# Altium PCB PICOROM-Flex.PcbDoc
Units mm, origin at the board's own origin, x right, y up, seen from the top; angles counter-clockwise.
Board outline 30.97 x 12.2 mm, 4 copper layers (Top Layer, Mid-Layer 1, Layer 2, Bottom Layer); 52 components, 128 nets, 307 pads, 129 vias.
Unrouted connection lines stored in the file: 11.
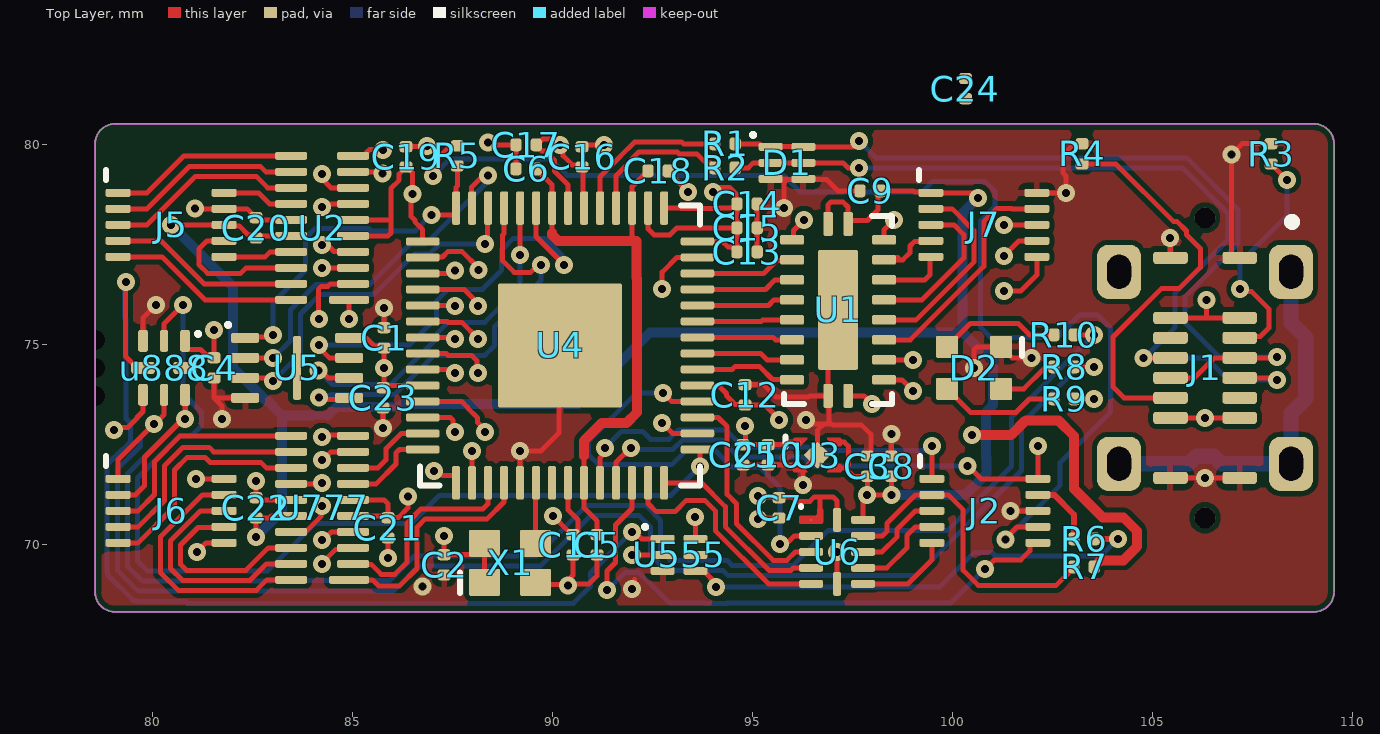
[diagram p0: Top Layer view]
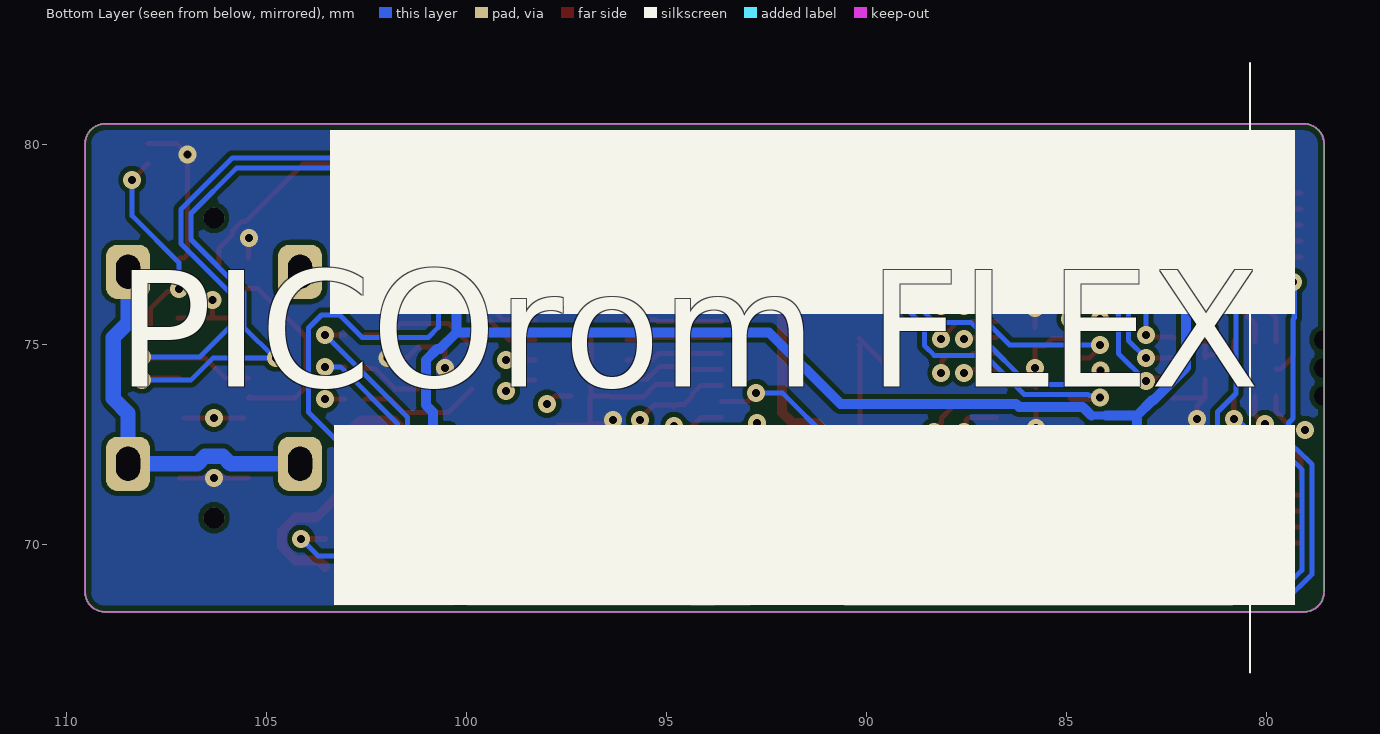
[diagram p1: Bottom Layer view, seen from below]
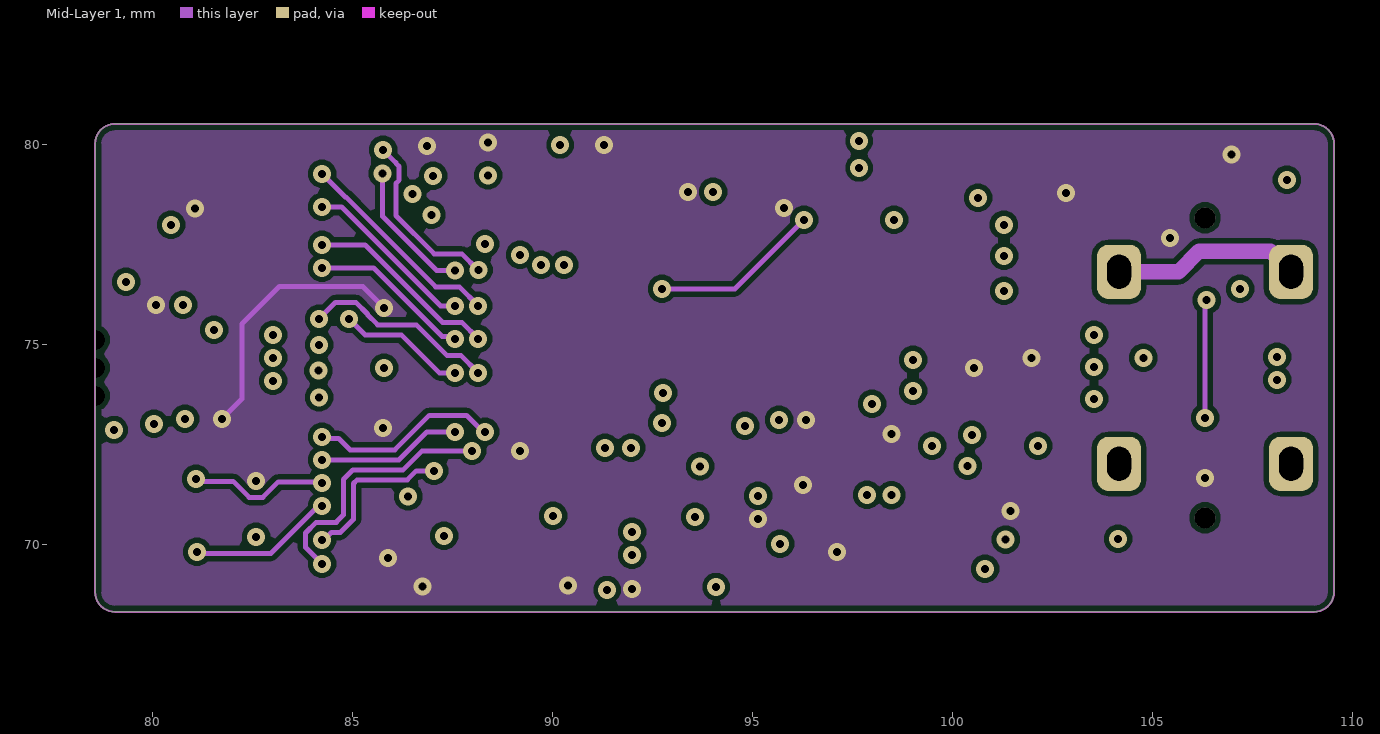
[diagram p2: Mid-Layer 1]
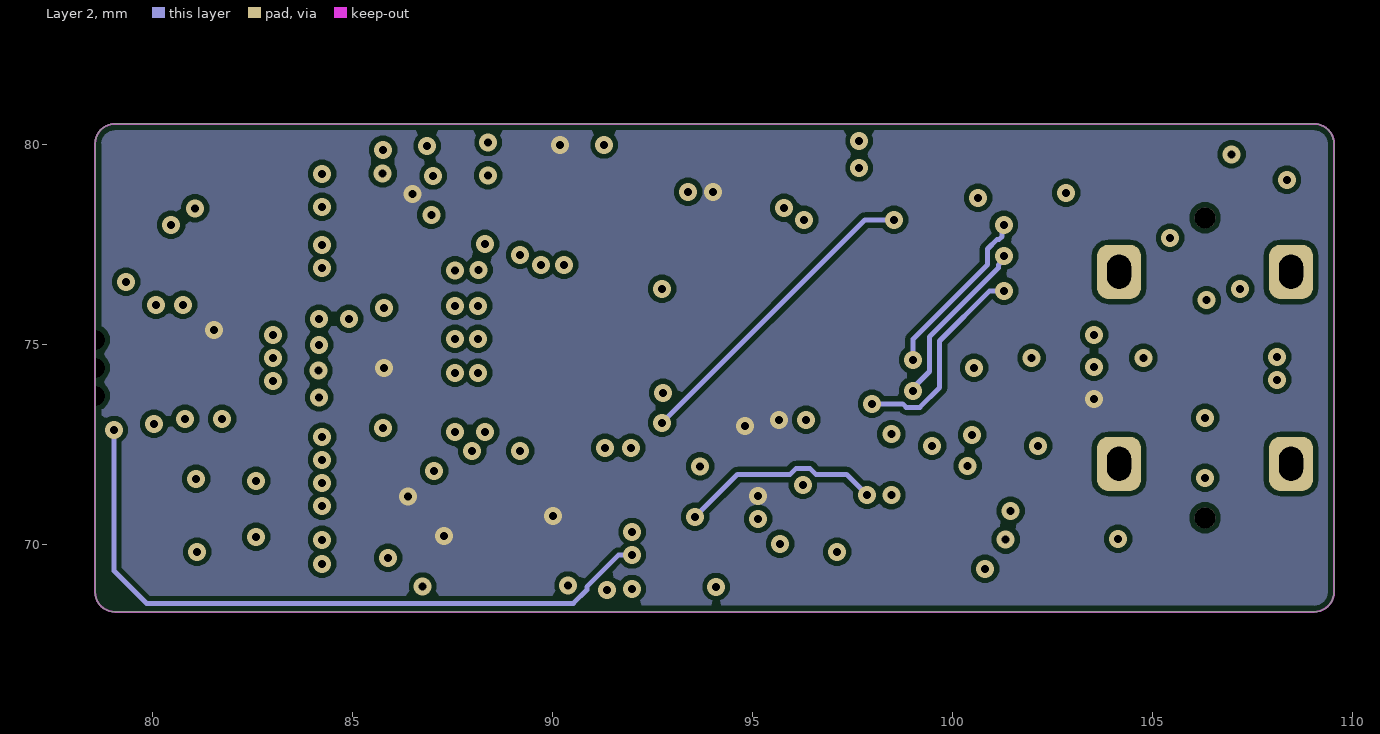
[diagram p3: Layer 2]
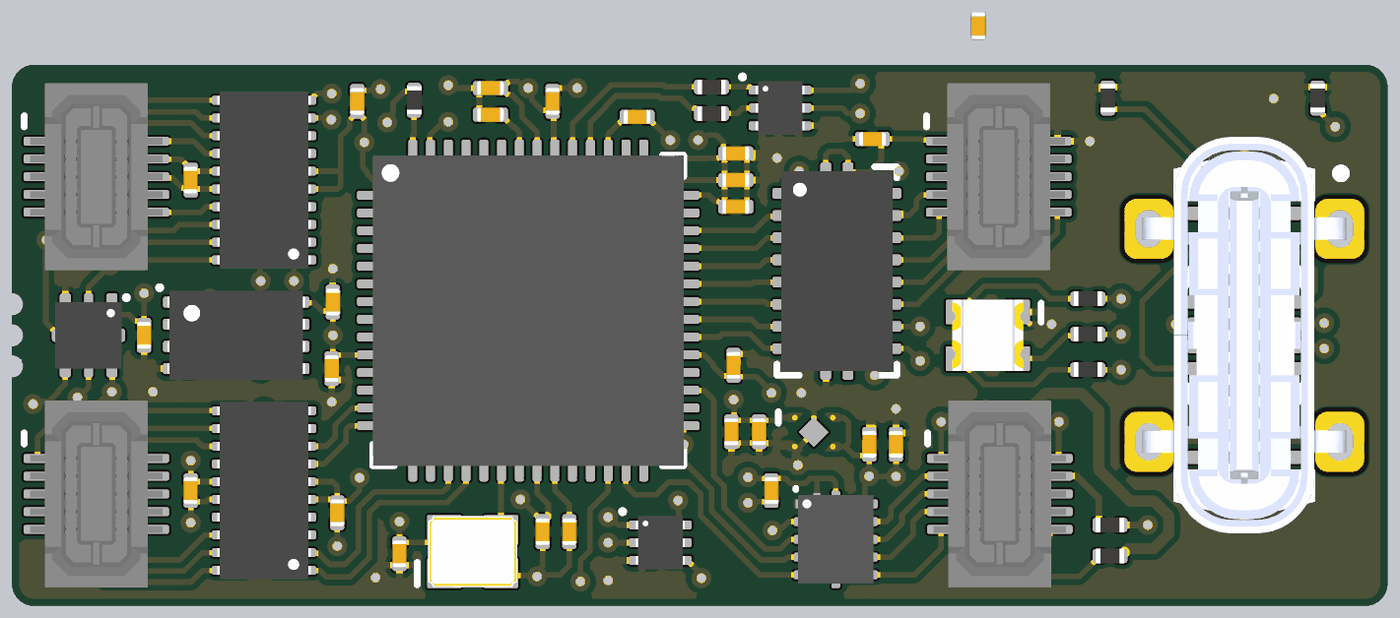
[diagram p4: 3D render of the assembled board from above, using the file's embedded part models]

## Layer stack, top to bottom
Top Solder: solder mask 0.0102, Solder Resist, Dk 3.5
Top Layer: signal copper 0.0356
Dielectric 1: dielectric 0.32, FR-4, Dk 4.8
Mid-Layer 1: signal copper 0.0356
Dielectric2: dielectric 0.32, FR-4, Dk 4.8
Layer 2: signal copper 0.035
Dielectric3: dielectric 0.32, FR-4, Dk 4.8
Bottom Layer: signal copper 0.0356
Bottom Solder: solder mask 0.0102, Solder Resist, Dk 3.5

## Board outline
78.569,68.826 78.569,80.026 cw(c79.069,80.026) 79.069,80.526 109.044,80.526 cw(c109.044,80.026) 109.544,80.026 109.544,68.826 cw(c109.044,68.826) 109.044,68.326 79.069,68.326 cw(c79.069,68.826)

## Design rules (kind name [scope] priority, off if disabled: settings)
Clearance [All] p1: gap=0.125 ignorepadtopadclearanceinfootprint=FALSE
ComponentClearance [All] p1: gap=0.1 collisioncheckmode=3 verticalgap=0.254 showdistances=FALSE
MinimumSolderMaskSliver [All] p1: minsoldermaskwidth=0.099
NetAntennae [All] p1: netantennaetolerance=0.1
PolygonConnect [All] p1: thpad.connectstyle=Direct thpad.reliefconductorwidth=0.254 thpad.reliefentries=4 thpad.polygonreliefangle="90 Angle" thpad.airgapwidth=0.254 smdpad.connectstyle=Relief smdpad.reliefconductorwidth=0.15 smdpad.reliefentries=4 smdpad.polygonreliefangle="90 Angle" smdpad.airgapwidth=0.15 via.connectstyle=Direct via.reliefconductorwidth=0.254 via.reliefentries=4 via.polygonreliefangle="90 Angle" via.airgapwidth=0.254
RoutingVias [All] p1: holewidth=0.2 width=0.45 viastyle="Through Hole" minholewidth=0.2 minwidth=0.45 maxholewidth=0.2 maxwidth=0.45
SilkToSilkClearance [All] p1: silktosilkclearance=0.1
SilkToSolderMaskClearance [IsPad] p1: minsilkscreentomaskgap=0.1 clearancetoexposedcopper=TRUE
SolderMaskExpansion [All] p1: expansion=0.102 istentingtop=FALSE
SupplyNets "Schematic Supply Nets_9" [InNet('RESET')] p1: voltage=0.000
SupplyNets "Schematic Supply Nets_8" [InNet('BOOT')] p2: voltage=0.000
SupplyNets "Schematic Supply Nets_7" [InNet('EXTRES')] p3: voltage=0.000
SupplyNets "Schematic Supply Nets_6" [InNet('P5V')] p4: voltage=0.000
SupplyNets "Schematic Supply Nets_5" [InNet('SWD')] p5: voltage=0.000
SupplyNets "Schematic Supply Nets_4" [InNet('P1V1')] p6: voltage=0.000
SupplyNets "Schematic Supply Nets_3" [InNet('P3V3')] p7: voltage=0.000
SupplyNets "Schematic Supply Nets_2" [InNet('SWC')] p8: voltage=0.000
SupplyNets "Schematic Supply Nets_1" [InNet('GND')] p9: voltage=0.000
SupplyNets "Schematic Supply Nets" [InNet('VUSB')] p10: voltage=0.000
Width [All] p1: maxlimit=5 minlimit=0.125 preferedwidth=0.125
25 further rules are at their usual default settings.

## Classes and differential pairs
component class 2716-2736: J10 U7

## Components (designator, comment, footprint, x,y, rotation, side; value= is the part's Value field where it differs from the comment)
C1 "CAP0201" CAPC0201 85.794,75.176 r90 top
C2 "CAP0201" CAPC0201 87.294,69.501 r270 top
C3 "CAP0201" CAPC0201 97.876,71.969 r90 top
C4 "CAP0201" CAPC0201 81.544,74.426 r270 top
C5 "CAP0201" CAPC0201 91.119,70.001 r270 top
C6 "CAP0201" CAPC0201 89.344,79.401 r180 top
C7 "CAP0201" CAPC0201 95.669,70.926 r270 top
C8 "CAP0201" CAPC0201 98.476,71.969 r90 top
C9 "CAP0201" CAPC0201 97.944,78.851 r180 top
C10 "CAP0201" CAPC0201 95.394,72.251 r270 top
C11 "CAP0201" CAPC0201 90.519,70.001 r270 top
C12 "CAP0201" CAPC0201 94.819,73.751 r90 top
C13 "CAP0201" CAPC0201 94.869,77.326 r0 top
C14 "CAP0201" CAPC0201 94.869,78.526 r0 top
C15 "CAP0201" CAPC0201 94.869,77.926 r0 top
C16 "CAP0201" CAPC0201 90.744,79.701 r90 top
C17 "CAP0201" CAPC0201 89.344,80.001 r180 top
C18 "CAP0201" CAPC0201 92.644,79.351 r0 top
C19 "CAP0201" CAPC0201 86.344,79.701 r90 top
C20 "CAP0201" CAPC0201 82.594,77.926 r90 top
C21 "CAP0201" CAPC0201 85.894,70.426 r270 top
C22 "CAP0201" CAPC0201 82.594,70.926 r90 top
C23 "CAP0201" CAPC0201 85.769,73.676 r270 top
C24 "CAP0201" CAPC0201 100.33,81.407 r270 top
C25 "CAP0201" CAPC0201 94.769,72.251 r270 top
D1 "CDDFN6-3312P" SON40P100X50-6L 95.869,79.551 r0 top
D2 "RGB" LED-1616-RGB 100.544,74.426 r0 top
J1 "CONN-SAMESKY-UJ20-C-V-G-SMT-P16-TR" CONN-SAMESKY-UJ20-C-V-G-SMT-P16-TR 106.319,74.426 r270 top
J2 "CONN-HIROSE-DF37NC-10DS" CONN-HIROSE-DF37NC-10DS 100.814,70.851 r0 top
J5 "CONN-HIROSE-DF37NC-10DS" CONN-HIROSE-DF37NC-10DS 80.469,78.001 r0 top
J6 "CONN-HIROSE-DF37NC-10DS" CONN-HIROSE-DF37NC-10DS 80.469,70.851 r0 top
J7 "CONN-HIROSE-DF37NC-10DS" CONN-HIROSE-DF37NC-10DS 100.789,78.001 r0 top
R1 "RESC0201" RESC0201 94.319,80.026 r180 top value=27R
R2 "RESC0201" RESC0201 94.319,79.426 r180 top value=27R
R3 "RESC0201" RESC0201 107.969,79.776 r270 top value=5K1
R4 "RESC0201" RESC0201 103.244,79.776 r90 top value=5K1
R5 "RESC0201" RESC0201 87.624,79.726 r270 top value=1K
R6 "RESC0201" RESC0201 103.294,70.151 r0 top value=27R
R7 "RESC0201" RESC0201 103.294,69.451 r0 top value=100K
R8 "RESC0201" RESC0201 102.794,74.451 r0 top value=1K
R9 "RESC0201" RESC0201 102.794,73.651 r0 top value=1K
R10 "RESC0201" RESC0201 102.794,75.251 r0 top value=1K
U1 "74AHCT245" QFN50P450X250-20TH300X100 97.144,75.876 r0 top
U2 "IC-TI-TXB0108-DQS" SON40P200X55-20N 84.244,77.926 r180 top
U3 "TPS7A0233PDQNR" X2SON4-1X1 96.626,72.244 r0 top
U4 "IC-RPI-RP2040-PICOROM" QFN40P700X700X90-56N-TH310X310 90.194,74.986 r0 top
U5 "IC-WINBOND-W25Q128JVS" SON50P300X60_HS-9N 83.619,74.426 r0 top
U6 "IC-TI-TXB0104-RUT" FOOTPRINT-TI-RUT 97.119,69.826 r0 top
U555 "74LVC1G126" SON40P100X50-6L 93.169,69.751 r0 top
U777 "IC-TI-TXB0108-DQS" SON40P200X55-20N 84.244,70.926 r180 top
u888 "TCA5405RUGR" PQFN50P150X150X40-8N 80.294,74.426 r270 top (schematic designator U888)
X1 "XOSC" XOSC-YXC-2016 88.944,69.551 r0 top

## Footprints (in the part's own frame and the unit in brackets; to place one, negate y for a bottom-side part, rotate by r counter-clockwise, add the part's x,y. Pads: shape width x height; smd on the part's side, far side on the other; paste and mask are expansions set on the pad)
CAPC0201 [mm]
  rrect50% 0.28x0.32 smd mask+0.05: 1(-0.253,0) 2(0.253,0)
  body extent -0.32,-0.16 0.31,0.17, height 0.33
CONN-HIROSE-DF37NC-10DS [mm]
  rrect50% 0.63x0.2 smd paste+0 mask+0.05: 1(-1.325,0.8) 2(1.325,0.8) 3(-1.325,0.4) 4(1.325,0.4) 5(-1.325,0) 6(1.325,0) 7(-1.325,-0.4) 8(1.325,-0.4) 9(-1.325,-0.8) 10(1.325,-0.8)
  silkscreen extent -1.63,1.12 -1.63,1.38, body extent -1.49,-2.11 1.49,2.11, height 0.99
CONN-SAMESKY-UJ20-C-V-G-SMT-P16-TR [mm]
  rrect50% 0.3x0.87 smd mask+0.05: A1(-2.75,0.865) A4(-1.25,0.865) A5(-0.75,0.865) A6(-0.25,0.865) A7(0.25,0.865) A8(0.75,0.865) A9(1.25,0.865) A12(2.75,0.865) B1(2.75,-0.865) B4(1.25,-0.865) B5(0.75,-0.865) B6(0.25,-0.865) B7(-0.25,-0.865) B8(-0.75,-0.865) B9(-1.25,-0.865) B12(-2.75,-0.865)
  rrect50% 1.35x1.1 hole 0.6 slot 0.85 at 0 deg mask+0.1: SH1(-2.4,2.15) SH2(2.4,2.15) SH3(-2.4,-2.15) SH4(2.4,-2.15)
  round 0.52 hole 0.52 unplated mask+0.15: ""(-3.75,0) ""(3.75,0)
  silkscreen extent -3.75,2.08 -3.55,2.27, body extent -4.47,-2.3 4.47,2.3, height 6.41
FOOTPRINT-TI-RUT [mm] "R-PUQFN-N12, TI RUT"
  round 0.025 smd paste+0 mask+0.05: 1(-0.65,0.8)
  rrect50% 0.6x0.2 smd paste+0 mask+0.05: 2(-0.65,0.4) 3(-0.65,0) 4(-0.65,-0.4) 5(-0.65,-0.8) 7(0.65,-0.8) 8(0.65,-0.4) 9(0.65,0) 10(0.65,0.4) 11(0.65,0.8)
  rrect50% 0.2x0.6 smd paste+0 mask+0.05: 6(0,-0.8) 12(0,0.8)
  Top Layer region: -0.9,0.9 -0.919,0.896 -0.935,0.885 -0.946,0.869 -0.95,0.85 -0.95,0.85 -0.95,0.75 -0.946,0.731 -0.935,0.715 -0.919,0.704 -0.9,0.7 -0.9,0.7 -0.4,0.7 -0.381,0.704 -0.365,0.715 -0.354,0.731 -0.35,0.75 -0.35,0.75 -0.35,1.05 -0.354,1.069 -0.365,1.085 -0.381,1.096 -0.4,1.1 -0.4,1.1 -0.45,1.1 -0.469,1.096 -0.485,1.085 -0.496,1.069 -0.5,1.05 -0.5,1.05 -0.5,0.95 -0.504,0.931 -0.515,0.915 -0.531,0.904 -0.55,0.9 -0.55,0.9
  silkscreen extent -0.9,1.12 -0.9,1.15, body extent -0.85,-1 0.85,1, height 0.55
LED-1616-RGB [mm]
  rrect12% 0.55x0.55 smd paste+0 mask+0.05: 1(0.675,0.525) 2(-0.675,0.525) 3(-0.675,-0.525) 4(0.675,-0.525)
  silkscreen extent 1.2,0.3 1.2,0.72, body extent -0.8,-0.8 0.8,0.8, height 0.71
PQFN50P150X150X40-8N [mm] "PQFN, 8-Leads, Body 1.50x1.50mm, Pitch 0.50mm, IPC Medium Density"
  rrect50% 0.55x0.25 smd mask+0.05: 1(-0.675,0.525) 3(-0.675,-0.525) 5(0.675,-0.525) 7(0.675,0.525)
  rrect50% 0.55x0.2 smd mask+0.05: 2(-0.675,0) 6(0.675,0)
  rrect50% 0.3x0.6 smd mask+0.05: 4(0,-0.525) 8(0,0.525)
  silkscreen extent -0.9,0.8 -0.8,0.9, body extent -0.75,-0.75 0.75,0.75, height 0.4
QFN40P700X700X90-56N-TH310X310 [mm]
  rrect50% 0.84x0.2 smd mask+0.05: 1(-3.435,2.6) 2(-3.435,2.2) 3(-3.435,1.8) 4(-3.435,1.4) 5(-3.435,1) 6(-3.435,0.6) 7(-3.435,0.2) 8(-3.435,-0.2) 9(-3.435,-0.6) 10(-3.435,-1) 11(-3.435,-1.4) 12(-3.435,-1.8) 13(-3.435,-2.2) 14(-3.435,-2.6) 29(3.435,-2.6) 30(3.435,-2.2) 31(3.435,-1.8) 32(3.435,-1.4) 33(3.435,-1) 34(3.435,-0.6) 35(3.435,-0.2) 36(3.435,0.2) 37(3.435,0.6) 38(3.435,1) 39(3.435,1.4) 40(3.435,1.8) 41(3.435,2.2) 42(3.435,2.6)
  rrect50% 0.2x0.84 smd mask+0.05: 15(-2.6,-3.435) 16(-2.2,-3.435) 17(-1.8,-3.435) 18(-1.4,-3.435) 19(-1,-3.435) 20(-0.6,-3.435) 21(-0.2,-3.435) 22(0.2,-3.435) 23(0.6,-3.435) 24(1,-3.435) 25(1.4,-3.435) 26(1.8,-3.435) 27(2.2,-3.435) 28(2.6,-3.435) 43(2.6,3.435) 44(2.2,3.435) 45(1.8,3.435) 46(1.4,3.435) 47(1,3.435) 48(0.6,3.435) 49(0.2,3.435) 50(-0.2,3.435) 51(-0.6,3.435) 52(-1,3.435) 53(-1.4,3.435) 54(-1.8,3.435) 55(-2.2,3.435) 56(-2.6,3.435)
  rrect3% 3.1x3.1 smd paste-0.57 mask+0.05: 57(0,0)
  silkscreen extent -3.5,-3.5 3.5,3.5, body extent -3.5,-3.5 3.5,3.5, height 0.9
QFN50P450X250-20TH300X100 [mm]
  rrect41% 0.24x0.6 smd mask+0.051: 1(-0.25,2.15) 10(-0.25,-2.15) 11(0.25,-2.15) 20(0.25,2.15)
  rrect41% 0.6x0.24 smd mask+0.051: 2(-1.15,1.75) 3(-1.15,1.25) 4(-1.15,0.75) 5(-1.15,0.25) 6(-1.15,-0.25) 7(-1.15,-0.75) 8(-1.15,-1.25) 9(-1.15,-1.75) 12(1.15,-1.75) 13(1.15,-1.25) 14(1.15,-0.75) 15(1.15,-0.25) 16(1.15,0.25) 17(1.15,0.75) 18(1.15,1.25) 19(1.15,1.75)
  rrect10% 1x3 smd mask+0.051: 21(0,0)
  silkscreen extent -1.35,-2.35 1.35,2.35, body extent -1.25,-2.25 1.25,2.25, height 0.9
RESC0201 [mm] "RES, 0201 Chip Resistor, 2-Leads, Body 0.60x0.30mm, IPC High Density"
  rrect50% 0.28x0.32 smd mask+0.05: 1(-0.253,0) 2(0.253,0)
  body extent -0.32,-0.17 0.32,0.17, height 0.26
SON40P100X50-6L [mm] "SON, 6-Leads, Body 1.20x1.00mm, Pitch 0.40mm, IPC High Density"
  rrect50% 0.6x0.2 smd mask+0.05: 1(-0.41,0.4) 2(-0.41,0) 3(-0.41,-0.4) 4(0.41,-0.4) 5(0.41,0) 6(0.41,0.4)
  silkscreen extent -0.9,0.65 -0.8,0.75, body extent -0.55,-0.6 0.55,0.6, height 0.5
SON40P200X55-20N [mm] "SON, 20-Leads, Body 4.00x2.00mm, Pitch 0.40mm, IPC Medium Density"
  rrect50% 1x0.2 smd mask+0.05: 1(-0.675,1.8)
  rrect50% 0.8x0.2 smd mask+0.05: 2(-0.775,1.4) 3(-0.775,1) 4(-0.775,0.6) 5(-0.775,0.2) 6(-0.775,-0.2) 7(-0.775,-0.6) 8(-0.775,-1) 9(-0.775,-1.4) 10(-0.775,-1.8) 11(0.775,-1.8) 12(0.775,-1.4) 13(0.775,-1) 14(0.775,-0.6) 15(0.775,-0.2) 16(0.775,0.2) 17(0.775,0.6) 18(0.775,1) 19(0.775,1.4) 20(0.775,1.8)
  body extent -1.05,-2 1.05,2, height 0.55
SON50P300X60_HS-9N [mm] "SON, 8-Leads, Body 2.00x3.00mm, Pitch 0.50mm, Thermal Pad 1.60x0.20mm, IPC Medium Density"
  rrect40% 0.7x0.25 smd mask+0.05: 1(-1.3,0.75) 2(-1.3,0.25) 3(-1.3,-0.25) 4(-1.3,-0.75) 5(1.3,-0.75) 6(1.3,-0.25) 7(1.3,0.25) 8(1.3,0.75)
  rrect50% 0.2x1.6 smd mask+0.05: 9(0,0)
  silkscreen extent -1.77,1.03 -1.68,1.12, body extent -1.55,-1 1.55,1, height 0.6
X2SON4-1X1 [mm] "FOOTPRINT, TI, DQN0004A X2SON4"
  round 0.025 smd mask+0.05: 1(-0.43,0.325) 2(-0.43,-0.325) 3(0.43,-0.325) 4(0.43,0.325)
  rrect4% 0.48x0.48 smd rot 45 mask+0.05: 5(0,0)
  Top Layer region: 0.43,0.22 0.25,0.4 0.25,0.43 0.559,0.43 0.579,0.426 0.595,0.415 0.606,0.399 0.61,0.379 0.61,0.379 0.61,0.271 0.606,0.251 0.595,0.235 0.579,0.224 0.559,0.22 0.559,0.22 0.52,0.22
  Top Layer region: -0.43,0.22 -0.25,0.4 -0.25,0.43 -0.559,0.43 -0.579,0.426 -0.595,0.415 -0.606,0.399 -0.61,0.379 -0.61,0.379 -0.61,0.271 -0.606,0.251 -0.595,0.235 -0.579,0.224 -0.559,0.22 -0.559,0.22 -0.52,0.22
  Top Layer region: -0.43,-0.22 -0.25,-0.4 -0.25,-0.43 -0.559,-0.43 -0.579,-0.426 -0.595,-0.415 -0.606,-0.399 -0.61,-0.379 -0.61,-0.379 -0.61,-0.271 -0.606,-0.251 -0.595,-0.235 -0.579,-0.224 -0.559,-0.22 -0.559,-0.22 -0.52,-0.22
  Top Layer region: 0.43,-0.22 0.25,-0.4 0.25,-0.43 0.559,-0.43 0.579,-0.426 0.595,-0.415 0.606,-0.399 0.61,-0.379 0.61,-0.379 0.61,-0.271 0.606,-0.251 0.595,-0.235 0.579,-0.224 0.559,-0.22 0.559,-0.22 0.52,-0.22
  silkscreen extent -0.8,0.2 -0.8,0.46, body extent -0.5,-0.5 0.5,0.5, height 0.4
XOSC-YXC-2016 [mm] "YSO110TR"
  rrect10% 0.775x0.675 smd paste+0 mask+0.05: 1(-0.637,-0.487) 2(0.637,-0.487) 3(0.637,0.487) 4(-0.637,0.487)
  silkscreen extent -1.25,-0.75 -1.25,-0.24, body extent -1,-0.8 1,0.8, height 0.76

## Part data
C1 C2 C3 C4 C5 C6 C7 C8 C9 C10 C11 C12 C13 C14 C15 C16 C17 C18 C19 C20 C21 C22 C23 C24 C25: library part CAPC-0201-100nF-16V, "CAPACITOR,CERAMIC,100nF,16V,X7R,0201", Capacitance=100nF, Dielectric=X7R, LCSC=C668346, Package / Case=0402, Supplier Part Number 1=490-GRM033Z71C104KE14DCT-ND, Voltage=16V, Supplier 1=Digikey
D1: library part TVS-BOURNS-CDDFN6-3312P, LCSC=C3700524
D2: library part LED-TOGIALED-TJ-S1615CY6TGLCCSRGB-A5, LCSC=C601684, MFR=KINGBRIGHT, MPN=APTF1616SEKJ3ZGKQBKC
J1: LCSC=C2686963, MFR=SAMESKY, MPN=UJ20-C-V-G-SMT-P16-TR, Package=None, Availability=Unavailable, MP=UJ20-C-V-G-SMT-P16-TR, Price=None
J2 J5 J6 J7: LCSC=C324718
R1 R2 R6: library part RESC-0201-27R-1%-1/10W, "RESISTOR,27R,1%,63mW,0201", LCSC=C473051, Power=1/16W, Tolerance=1%
R3 R4: library part RESC-0201-5K1-1%-1/10W, "RESISTOR,5K1,1%,63mW,0201", LCSC=C274341, Power=1/16W, Tolerance=1%
R5 R8 R9 R10: library part RESC-0201-1K-1%-1/10W, "RESISTOR,1K,1%,63mW,0201", LCSC=C138165, Power=1/16W, Tolerance=1%
R7: library part RESC-0201-100K-1%-1/10W, "RESISTOR,100K,1%,63mW,0201", LCSC=C106224, Power=1/16W, Tolerance=1%
U1: library part IC-NEXPERIA-74AHCT245
U3: library part IC-TI-TPS7A0233PDQNR, LCSC=C2860046
U4: LCSC=C2040
U555: library part IC-DIODES-74LVC1G126-SON6, MPN=C163712
u888: library part IC-TI-TCA5405RUGR, MPN=C2674123
X1: library part XOSC-YXC-OT201612MJBA4SL, "XTAL,4PIN", LCSC=C669076

## Free pads (board coordinates)
  rrect0% 0x0 hole 0.5 unplated paste-2539.97 mask+0.15: MB(78.569,73.726) MB(78.569,74.426) MB(78.569,75.126)

## Via types
v1: diameter 0.45, hole 0.2, Top Layer to Bottom Layer, tented both sides, 129 vias

## Nets (pads, with @x,y where several pads share a name; then routed paths per layer and width w, separated by ;. In a path a pad name is that pad's centre, name@x,y a point inside that pad or via, vN(x,y) a via of type N, cw(c..) or ccw(c..) an arc to the next point about the centre after c; other vN are vias at no path point)
A0: U2.10 U4.2 | length 7.3
  Top Layer w0.125: U2.10@84.744,79.726 85.319,79.726 85.357,79.764 85.357,79.809 85.43,79.882 85.763,79.882 v1(85.769,79.876) ; U4.2 86.769,77.196 87.255,77.196 87.398,77.339 87.74,77.339 88.155,76.923 v1(88.155,76.873)
  Mid-Layer 1 w0.125: v1(85.769,79.876) 86.089,79.556 86.089,79.543 86.173,79.459 86.173,79.118 86.089,79.034 86.089,78.235 87.048,77.276 87.74,77.276 88.143,76.873 v1(88.155,76.873)
A1: U2.9 U4.3 | length 5.3
  Top Layer w0.125: U2.9@84.744,79.326 85.723,79.326 v1(85.761,79.289) ; U4.3 87.404,76.786 87.481,76.863 v1(87.569,76.863)
  Mid-Layer 1 w0.125: v1(85.761,79.289) 85.761,78.209 87.107,76.863 v1(87.569,76.863)
A2: U2.8 U4.4 | length 7.6
  Top Layer w0.125: v1(84.244,79.276) 84.306,79.214 84.306,79.087 84.467,78.926 U2.8@84.744,78.926 ; U4.4 87.371,76.386 87.373,76.388 87.794,76.388 88.144,76.038 v1(88.144,75.976)
  Mid-Layer 1 w0.125: v1(84.244,79.276) 84.819,78.701 84.833,78.701 87.083,76.451 87.677,76.451 88.144,75.984 v1(88.144,75.976)
A3: U2.7 U4.5 | length 5.7
  Top Layer w0.125: v1(84.244,78.451) 84.332,78.451 84.407,78.526 U2.7@84.744,78.526 ; U4.5 87.559,75.986 v1(87.569,75.976)
  Mid-Layer 1 w0.125: v1(84.244,78.451) 84.729,78.451 87.204,75.976 v1(87.569,75.976)
A4: U2.4 U4.6 | length 7.3
  Top Layer w0.125: v1(84.244,77.501) 84.306,77.439 84.442,77.439 84.544,77.337 84.983,77.337 U2.4@84.994,77.326 ; U4.6 87.376,75.586 87.398,75.563 87.74,75.563 88.144,75.159 v1(88.144,75.151)
  Mid-Layer 1 w0.125: v1(84.244,77.501) 85.319,77.501 87.257,75.563 87.74,75.563 88.144,75.159 v1(88.144,75.151)
A5: U2.3 U4.7 | length 5.4
  Top Layer w0.125: v1(84.244,76.926) U2.3@84.744,76.926 ; U4.7 87.534,75.186 v1(87.569,75.151)
  Mid-Layer 1 w0.125: v1(84.244,76.926) 85.53,76.926 87.243,75.213 87.507,75.213 v1(87.569,75.151)
A6: U2.2 U4.8 | length 8.3
  Top Layer w0.125: v1(84.169,75.651) 84.149,75.671 84.149,76.39 84.222,76.463 84.39,76.463 84.452,76.526 U2.2@84.994,76.526 ; U4.8 87.351,74.786 87.398,74.738 87.982,74.738 88.115,74.605 88.115,74.33 v1(88.144,74.301)
  Mid-Layer 1 w0.125: v1(84.169,75.651) 84.582,76.064 85.09,76.064 85.382,75.772 85.382,75.755 85.636,75.501 86.602,75.501 87.364,74.738 87.715,74.738 88.144,74.309 v1(88.144,74.301)
A7: U2.1 U4.9 | length 4.5
  Top Layer w0.125: v1(84.919,75.651) U2.1 ; U4.9 87.396,74.386 87.481,74.301 v1(87.569,74.301)
  Mid-Layer 1 w0.125: v1(84.919,75.651) 85.319,75.251 86.227,75.251 87.177,74.301 v1(87.569,74.301)
A8: U4.11 U777.10 | length 7.5
  Top Layer w0.125: v1(84.244,72.701) 84.292,72.749 84.996,72.749 U777.10 ; U4.11 87.734,73.586 87.877,73.443 87.877,73.431 88.134,73.174 88.134,73.062 88.319,72.877 v1(88.319,72.826)
  Mid-Layer 1 w0.125: v1(84.244,72.701) 84.282,72.664 84.656,72.664 84.944,72.376 86.064,72.376 86.926,73.239 87.856,73.239 88.194,72.901 88.244,72.901 v1(88.319,72.826)
A9: U4.12 U777.9 | length 5.5
  Top Layer w0.125: v1(84.244,72.126) 84.267,72.126 84.467,72.326 U777.9@84.994,72.326 ; U4.12 87.449,73.186 87.522,73.113 87.522,72.873 v1(87.569,72.826)
  Mid-Layer 1 w0.125: v1(84.244,72.126) 86.167,72.126 86.867,72.826 v1(87.569,72.826)
A10: U4.13 U777.8 | length 2.3
  Top Layer w0.125: U777.8 85.644,71.926 85.844,72.126 85.844,72.404 86.226,72.786 U4.13
A11: U4.14 U777.7 | length 2.3
  Top Layer w0.125: U777.7 85.598,71.526 86.094,72.022 86.094,72.3 86.18,72.386 U4.14
A12: U4.15 U777.4 | length 5.5
  Top Layer w0.125: v1(84.244,70.126) 84.282,70.126 84.476,70.32 85.013,70.32 U777.4 ; v1(87.044,71.851) 87.132,71.851 87.252,71.731 U4.15@87.594,71.731
  Mid-Layer 1 w0.125: v1(84.244,70.126) 84.292,70.126 84.48,70.313 84.707,70.313 85.032,70.638 85.032,71.535 85.123,71.626 86.374,71.626 86.599,71.851 v1(87.044,71.851)
A13: U4.16 U777.3 | length 8.1
  Top Layer w0.125: v1(84.244,69.526) 84.244,69.543 84.59,69.889 84.982,69.889 U777.3 ; U4.16@87.994,71.731 v1(87.994,72.351)
  Mid-Layer 1 w0.125: v1(84.244,69.526) 83.832,69.939 83.832,70.297 84.098,70.563 84.603,70.563 84.603,70.575 84.782,70.753 84.782,71.639 85.019,71.876 86.271,71.876 86.746,72.351 v1(87.994,72.351)
A14: U4.17 U777.2 | length 4.9
  Top Layer w0.125: U777.2@85.419,69.513 85.473,69.513 85.723,69.263 86.065,69.263 86.366,69.565 86.366,70.545 86.594,70.772 86.594,70.776 86.719,70.901 88.269,70.901 88.394,71.026 U4.17
A15: U4.18 U777.1 | length 6.1
  Top Layer w0.125: U777.1 85.507,69.126 85.657,68.976 86.184,68.976 86.617,69.409 86.617,69.936 86.617,70.441 86.826,70.651 88.373,70.651 88.794,71.072 U4.18@88.794,71.731
A16: U4.27 U6.5 | length 5.9
  Top Layer w0.125: U4.27 92.394,71.036 92.599,70.831 93.066,70.831 93.348,71.114 93.815,71.114 94.076,70.853 94.076,70.354 95.404,69.026 U6.5
A17: U4.28 U6.4 | length 4.9
  Top Layer w0.125: U4.28 93.013,71.551 93.232,71.551 93.731,71.551 94.326,70.956 94.326,70.457 95.42,69.363 95.968,69.363 96.031,69.426 U6.4
A_A8: 
A_A9: 
A_A10: 
A_A11: 
A_A12: 
A_A13: 
A_A14: 
A_A15: 
AA0: 
AA1: 
AA2: 
AA3: 
AA4: 
AA5: 
AA6: 
AA7: 
AA8: 
AA9: 
AA10: 
AA16: 
AA17: 
AB: 
AC: 
ACE: 
AD: 
AD0: 
AD1: 
AD2: 
AD3: 
AD4: 
AD5: 
AD6: 
AD7: 
AER: 
AG: 
AOE: 
AR: 
AV: 
BOOT: J2.8 R5.1 | length 30.5
  Top Layer w0.125: v1(87.019,79.226) 87.019,79.314 87.152,79.447 87.152,79.676 87.402,79.926 87.571,79.926 R5.1 ; v1(101.336,70.134) 101.336,70.168 101.619,70.451 J2.8
  Bottom Layer w0.125: v1(87.019,79.226) 87.444,79.651 89.961,79.651 90.373,79.239 95.779,79.239 96.191,78.826 99.25,78.826 99.513,79.089 100.815,79.089 101.064,78.839 101.064,78.458 100.711,78.105 100.711,75.438 100.965,75.184 102.616,75.184 103.179,75.747 103.631,75.747 103.957,75.422 103.957,73.319 102.696,72.059 102.696,71.495 v1(101.336,70.134)
CE: U4.32 U6.2 | length 11.3
  Top Layer w0.125: v1(92.769,73.801) 92.984,73.586 U4.32 ; v1(95.694,70.026) 95.756,70.088 95.919,70.088 96.056,70.226 U6.2
  Bottom Layer w0.125: v1(92.769,73.801) 92.111,73.801 90.907,72.597 90.907,72.255 91.148,72.013 92.997,72.013 93.362,72.379 94.057,72.379 94.491,71.944 95.186,71.944 95.694,71.436 v1(95.694,70.026)
D0: U1.9 U4.34 | length 2.5
  Top Layer w0.125: U4.34 94.492,74.386 94.562,74.456 95.184,74.456 95.507,74.134 95.986,74.134 U1.9
D1: U1.8 U4.35 | length 2.4
  Top Layer w0.125: U4.35 95.208,74.786 95.368,74.626 U1.8
D2: U1.7 U4.36 | length 2.4
  Top Layer w0.125: U4.36 95.519,75.186 95.579,75.126 U1.7
D3: U1.6 U4.37 | length 2.4
  Top Layer w0.125: U4.37 95.219,75.586 95.259,75.626 U1.6 U1.6@95.954,75.586
D4: U1.5 U4.38 | length 2.4
  Top Layer w0.125: U4.38 95.404,75.986 95.544,76.126 U1.5
D5: U1.4 U4.39 | length 2.5
  Top Layer w0.125: U4.39 95.329,76.386 95.569,76.626 U1.4
D6: U1.3 U4.40 | length 2.5
  Top Layer w0.125: U4.40 95.283,76.786 95.606,77.109 95.977,77.109 U1.3
D7: U1.2 U4.41 | length 6.3
  Top Layer w0.125: v1(92.744,76.401) 92.746,76.403 92.746,76.818 93.114,77.186 U4.41 ; U1.2 96.028,77.66 96.028,77.86 v1(96.294,78.126)
  Mid-Layer 1 w0.125: v1(92.744,76.401) 94.569,76.401 v1(96.294,78.126)
EXT_RESET_EN: U555.1 u888.4 | length 25.3
  Top Layer w0.125: v1(79.344,76.576) 79.331,76.576 79.331,74.714 79.644,74.401 u888.4@79.769,74.401 ; v1(91.994,70.326) 92.055,70.326 92.23,70.151 U555.1
  Bottom Layer w0.125: v1(79.344,76.576) 79.306,76.538 79.306,75.675 79.344,75.637 79.344,73.159 79.457,73.047 79.457,72.576 79.271,72.39 79.248,72.39 78.867,72.009 78.867,69.342 78.875,69.334 78.875,69.262 79.523,68.613 79.551,68.613 79.572,68.592 79.617,68.592 79.629,68.58 80.84,68.58 80.882,68.539 90.527,68.539 90.957,68.968 90.957,69.297 91.986,70.326 v1(91.994,70.326)
EXT_RESET_VALUE: U555.2 u888.5 | length 19.4
  Top Layer w0.125: v1(79.044,72.876) 79.106,72.938 79.394,72.938 79.619,73.164 79.619,73.184 79.769,73.334 u888.5@79.769,73.726 ; v1(91.994,69.751) U555.2
  Layer 2 w0.125: v1(79.044,72.876) 79.044,69.351 79.856,68.539 90.527,68.539 90.863,68.874 90.863,68.953 91.661,69.751 v1(91.994,69.751)
EXTRES: J2.4 R6.1 | length 1.7
  Top Layer w0.15: J2.4 102.549,71.251 103.041,70.759 R6.1
GND: C1.2 C2.2 C3.2 C4.2 C5.2 C6.2 C7.2 C8.2 C9.2 C10.2 C11.2 C12.2 C13.2 C14.2 C15.2 C16.2 C17.2 C18.2 C19.2 C20.2 C21.2 C22.2 C23.2 C24.2 C25.2 D1.3 D1.4 D2.1 J1.A1 J1.A12 J1.B1 J1.B12 J2.6 J5.4 J7.2 R3.1 R4.2 U1.10 U1.21 U2.15 U3.2 U3.5 U4.19 U4.57 U5.4 U6.6 U555.3 U777.15 u888.3 X1.2 | length 55.6
  Top Layer w0.125: u888.3@79.769,75.076 79.769,75.676 v1(80.094,76.001) ; v1(81.069,78.414) 81.082,78.401 J5.4 82.372,78.401 82.501,78.272 82.501,78.256 82.578,78.179 C20.2 ; C4.2@81.544,74.148 81.544,73.676 ; v1(81.744,73.151) 81.744,73.476 81.544,73.676 ; U5.4@82.34,73.655 U5.4 81.544,73.676 ; C22.2@82.593,71.18 82.647,71.126 U777.15 ; C22.2 C22.2@82.647,71.126 ; C22.2@82.594,71.181 v1(82.594,71.601) ; C20.2@82.681,78.126 U2.15 ; v1(85.769,72.926) C23.2@85.769,73.448 ; C1.2 v1(85.794,75.926) ; v1(85.894,69.676) C21.2 ; C19.2 86.847,79.954 v1(86.869,79.976) ; v1(86.756,68.964) v1@86.756,69.008 ; v1(88.394,80.063) 88.482,80.063 88.544,80.001 C17.2 C6.2 ; U4.19@89.194,71.731 v1(89.194,72.351) 89.719,72.351 90.165,72.797 90.165,74.957 U4.57 ; U4.57@89.194,74.166 U4.57@90.194,75.166 ; X1.2@89.581,69.014 90.369,69.014 v1(90.394,68.989) ; C11.2 90.519,69.239 90.394,69.114 90.394,69.026 90.919,69.026 91.119,69.226 91.119,69.376 C5.2 ; C16.2 90.791,80.001 v1(91.294,80.001) ; v1(91.994,68.901) 92.056,68.963 92.056,69.138 ; C18.2 92.897,79.327 92.974,79.249 92.974,79.246 v1(93.394,78.826) ; C25.2 C25.2@94.844,71.998 ; C12.2 95.283,74.004 95.594,73.693 96.394,73.693 96.427,73.726 U1.10 ; C25.2@94.903,71.94 C25.2@94.844,71.998 ; v1@95.107,70.688 v1(95.144,70.651) 95.166,70.673 C7.2 ; C13.2 C14.2@95.122,78.542 ; C14.2@95.122,78.51 95.199,78.433 95.231,78.433 95.241,78.423 v1(95.796,78.423) 95.796,79.055 95.879,79.138 ; D1.3 95.866,79.151 95.879,79.138 ; v1(96.266,71.501) 96.266,71.849 U3.2 ; v1(96.344,73.126) 96.394,73.076 96.419,73.076 96.476,73.019 96.779,73.019 ; U6.6@97.119,68.82 v1(97.119,69.826) ; U1.21@97.144,75.501 96.894,75.251 U1.10 ; C9.2 97.144,78.851 96.857,79.138 95.879,79.138 ; C3.2@97.969,72.235 97.969,72.776 97.951,72.776 97.733,72.994 97.011,72.994 96.986,73.019 96.872,73.019 ; C8.2 v1(98.476,72.769) ; v1(100.544,74.426) 100.544,74.878 100.617,74.951 D2.1 101.494,74.676 v1(101.981,74.676) ; v1(101.457,70.851) J2.6 ; J7.2 v1(102.844,78.801) 102.844,79.222 102.771,79.295 102.771,79.751 102.996,79.976 103.191,79.976 R4.2 ; v1(105.444,77.676) 105.454,77.666 J1.B12 ; J1.B1 v1(106.319,71.676) J1.A12 ; J1.A1 107.068,77.176 106.982,77.263 v1(106.982,79.764) 107.247,80.029 R3.1 ; C25.2@94.844,71.998 C10.2 96.117,71.998 U3.2 ; U3.2 96.301,71.919 U3.5 96.626,72.867 96.779,73.019 ; 96.779,73.019 96.872,73.019 ; 96.872,73.019 96.919,73.067 96.919,73.701 U1.10
  Mid-Layer 1 w0.125: v1(81.744,73.151) 82.244,73.651 82.244,75.526 83.176,76.458 85.262,76.458 v1(85.794,75.926)
INFO_LED1: J6.1 R8.2 u888.6 | length 36.4
  Top Layer w0.125: J6.1 79.144,72.126 v1(80.044,73.026) 80.064,73.026 80.294,73.256 u888.6@80.294,73.726 ; R8.2 v1(103.544,74.451)
  Bottom Layer w0.125: v1(80.044,73.026) 79.707,72.689 79.707,72.472 79.125,71.891 79.125,69.365 79.627,68.863 79.654,68.863 79.676,68.842 86.023,68.842 86.65,69.469 89.699,69.469 90.968,70.739 92.165,70.739 92.46,70.443 92.46,69.746 92.843,69.364 94.265,69.364 94.39,69.238 99.111,69.238 101.732,71.859 101.732,73.03 103.153,74.451 v1(103.544,74.451)
INFO_LED2: J6.3 R10.2 u888.7 | length 38.1
  Top Layer w0.125: J6.3@79.169,71.251 79.579,71.251 79.806,71.479 79.806,72.184 80.819,73.197 u888.7@80.819,73.726 ; v1(80.819,73.151) 80.833,73.165 80.833,73.737 u888.7 ; R10.2 v1(103.544,75.251)
  Bottom Layer w0.125: v1(80.819,73.151) 80.752,73.151 79.379,71.778 79.379,71.759 79.375,71.755 79.375,69.469 79.731,69.113 79.758,69.113 79.779,69.092 82.98,69.092 83.002,69.113 85.941,69.113 86.074,69.247 86.551,69.723 89.599,69.723 90.865,70.989 92.333,70.989 92.71,70.612 92.71,69.85 92.946,69.614 94.368,69.614 94.493,69.488 96.021,69.488 96.896,70.364 99.883,70.364 101.481,71.962 101.481,73.188 v1(103.544,75.251)
IO_EXPAND: U4.29 u888.2 | length 24.3
  Top Layer w0.125: u888.2@80.294,75.076 80.294,75.526 v1(80.769,76.001) ; U4.29 93.657,72.386 93.694,72.349 v1(93.694,71.966)
  Bottom Layer w0.125: v1(80.769,76.001) 80.769,73.784 81.232,73.322 81.232,72.98 80.99,72.738 80.693,72.738 79.629,71.674 79.629,69.596 79.883,69.342 82.877,69.342 84.073,70.539 86.481,70.539 87.181,71.239 92.967,71.239 v1(93.694,71.966)
IOA0: J5.1 U2.11 | length 4.4
  Top Layer w0.125: J5.1 79.869,78.801 80.794,79.726 U2.11@83.194,79.726
IOA1: J5.3 U2.12 | length 4.5
  Top Layer w0.125: J5.3 79.869,78.401 80.932,79.464 82.701,79.464 82.838,79.326 U2.12@83.194,79.326
IOA2: J5.5 U2.13 | length 4.7
  Top Layer w0.125: J5.5 79.869,78.001 81.082,79.214 82.597,79.214 82.885,78.926 U2.13@83.194,78.926
IOA3: J5.2 U2.14 | length 1.5
  Top Layer w0.125: J5.2 82.656,78.801 82.931,78.526 U2.14@83.194,78.526
IOA4: J5.10 U2.17 | length 2.5
  Top Layer w0.125: 82.556,77.201 J5.10 82.823,77.201 82.948,77.326 U2.17
IOA5: J5.8 U2.18 | length 3.3
  Top Layer w0.125: J5.8 81.366,77.601 81.166,77.401 81.166,77.007 81.385,76.788 82.209,76.788 82.347,76.926 U2.18@83.194,76.926
IOA6: J5.7 U2.19 | length 4.5
  Top Layer w0.125: J5.7 80.219,77.601 81.294,76.526 U2.19@83.194,76.526
IOA7: J5.9 U2.20 | length 4.5
  Top Layer w0.125: J5.9 80.244,77.201 81.319,76.126 U2.20@83.194,76.126
IOA8: J6.5 U777.11 | length 5.6
  Top Layer w0.125: J6.5@79.169,70.851 79.647,70.851 80.056,71.261 80.056,72.081 80.702,72.726 U777.11
IOA9: J6.7 U777.12 | length 5.7
  Top Layer w0.125: J6.7@79.169,70.451 79.647,70.451 80.306,71.111 80.306,71.977 80.768,72.439 81.42,72.439 81.533,72.326 U777.12
IOA10: J6.9 U777.13 | length 5.8
  Top Layer w0.125: J6.9@79.169,70.051 79.647,70.051 80.556,70.961 80.556,71.874 80.871,72.189 81.317,72.189 81.442,72.064 82.715,72.064 82.852,71.926 U777.13
IOA11: J6.2 U777.14 | length 5
  Top Layer w0.125: v1(81.094,71.651) J6.2@81.819,71.651 ; U777.14@83.444,71.526 84.219,71.526 v1(84.244,71.551)
  Mid-Layer 1 w0.125: v1(81.094,71.651) 81.155,71.59 82.022,71.59 82.423,71.188 82.765,71.188 83.152,71.576 84.219,71.576 v1(84.244,71.551)
IOA12: J6.10 U777.17 | length 5.9
  Top Layer w0.125: v1(81.119,69.826) v1(81.119,69.826) 81.342,70.051 81.819,70.051 J6.10@81.832,70.039 ; U777.17 83.507,70.363 83.87,70.363 84.22,70.713 v1@84.22,71.102 ; v1(84.244,70.976) 84.244,71.079 v1@84.22,71.102 ; v1@84.244,71.126 v1@84.22,71.102
  Mid-Layer 1 w0.125: v1(81.119,69.826) 81.157,69.788 82.97,69.788 84.157,70.976 v1(84.244,70.976)
IOA13: J6.8 U777.18 | length 4.8
  Top Layer w0.125: J6.8@81.801,70.433 81.143,70.433 80.707,69.997 80.707,69.514 80.856,69.364 82.34,69.364 82.902,69.926 U777.18
IOA14: J6.6 U777.19 | length 5.6
  Top Layer w0.125: J6.6 81.207,70.851 80.456,70.1 80.456,69.41 80.753,69.114 82.443,69.114 82.856,69.526 U777.19
IOA15: J6.4 U777.20 | length 6.5
  Top Layer w0.125: J6.4@81.819,71.251 81.254,71.251 80.206,70.204 80.206,69.306 80.649,68.864 80.699,68.864 82.601,68.864 82.863,69.126 U777.20
IOA16: J2.9 U6.7 | length 2.4
  Top Layer w0.125: U6.7 98.894,69.026 99.489,69.621 J2.9
IOA17: J2.7 U6.8 | length 2.3
  Top Layer w0.125: U6.8 98.364,69.426 98.861,69.923 98.861,70.233 99.079,70.451 J2.7
IOCE: J2.3 R7.1 U6.10 | length 7.8
  Top Layer w0.125: U6.10 98.257,70.226 98.361,70.331 98.361,70.533 99.079,71.251 99.899,71.251 100.274,70.876 100.274,69.363 100.648,68.989 102.599,68.989 103.041,69.431 R7.1
IOD0: J7.10 U1.11 | length 7.3
  Top Layer w0.125: U1.11 97.794,73.726 v1(97.994,73.526) ; v1(101.294,76.351) 101.719,76.351 102.114,76.746 J7.10
  Layer 2 w0.125: v1(97.994,73.526) 98.76,73.526 98.848,73.438 99.19,73.438 99.682,73.93 99.682,75.098 100.934,76.351 v1(101.294,76.351)
IOD1: J7.8 U1.12 | length 6.1
  Top Layer w0.125: U1.12 98.744,74.126 v1(99.019,73.851) ; v1(101.294,77.226) 101.669,77.601 J7.8
  Layer 2 w0.125: v1(99.019,73.851) 99.019,73.924 99.432,74.337 99.432,75.202 101.156,76.927 101.156,77 101.294,77.138 v1(101.294,77.226)
IOD2: J7.6 U1.13 | length 5.9
  Top Layer w0.125: U1.13 v1(99.019,74.626) ; v1(101.289,78.001) J7.6
  Layer 2 w0.125: v1(99.019,74.626) 99.019,75.143 100.882,77.006 100.882,77.397 101.123,77.639 101.172,77.639 101.245,77.712 101.245,77.957 v1(101.289,78.001)
IOD3: J7.4 U1.14 | length 5.8
  Top Layer w0.125: U1.14 98.951,75.126 100.789,76.964 100.789,78.084 101.118,78.414 101.484,78.414 101.496,78.401 J7.4
IOD4: J7.3 U1.15 | length 4.9
  Top Layer w0.125: U1.15 99.098,75.626 100.539,77.067 100.539,77.86 99.998,78.401 J7.3
IOD5: J7.5 U1.16 | length 3.9
  Top Layer w0.125: U1.16 99.244,76.126 100.289,77.171 100.289,77.756 100.044,78.001 J7.5
IOD6: J7.9 U1.17 | length 1.7
  Top Layer w0.125: U1.17@98.334,76.666 U1.17 99.319,76.626 99.444,76.751 99.444,77.164 99.427,77.164 J7.9
IOD7: J7.7 U1.18 | length 1.8
  Top Layer w0.125: 98.647,77.179 98.347,77.179 U1.18 98.763,77.126 98.941,77.303 98.941,77.473 99.058,77.59 99.453,77.59 J7.7
IOOE: J2.5 U6.9 | length 2.3
  Top Layer w0.125: U6.9 98.244,69.826 98.611,70.193 98.611,70.383 99.079,70.851 J2.5
NetD1_1: D1.1 D1.6 J1.A6 J1.B6 R1.1 | length 22.3
  Top Layer w0.125: R1.1 95.184,80.026 95.222,79.988 95.434,79.988 95.459,79.964 96.266,79.964 D1.6 97.519,79.951 v1(97.669,80.101) ; J1.B6 106.053,74.176 106.553,74.676 J1.A6 108.094,74.676 v1(108.119,74.701)
  Bottom Layer w0.125: v1(97.669,80.101) 98.094,79.676 105.859,79.676 107.144,78.391 107.144,77.529 105.823,76.208 105.823,75.547 106.669,74.701 v1(108.119,74.701)
NetD1_2: D1.2 D1.5 J1.A7 J1.B7 R2.1 | length 22.6
  Top Layer w0.125: R2.1 94.9,79.426 95.025,79.551 D1.2 D1.5 97.269,79.551 97.394,79.426 v1(97.669,79.426) ; v1(104.775,74.676) J1.B7 ; J1.A7 108.069,74.176 v1(108.119,74.126)
  Bottom Layer w0.125: v1(97.669,79.426) 105.755,79.426 106.894,78.287 106.894,77.633 105.573,76.312 105.573,75.443 104.806,74.676 v1(104.775,74.676) 106.34,74.676 106.89,74.126 v1(108.119,74.126)
NetD2_2: D2.2 R10.1 | length 3
  Top Layer w0.125: D2.2 100.457,75.539 101.644,75.539 101.931,75.251 R10.1
NetD2_3: D2.3 R9.1 | length 3.1
  Top Layer w0.125: D2.3 100.457,73.313 101.594,73.313 101.932,73.651 R9.1
NetD2_4: D2.4 R8.1 | length 1.5
  Top Layer w0.125: D2.4 101.789,73.901 102.303,74.415 102.505,74.415 R8.1
NetJ1_A5: J1.A5 R3.2 | length 6
  Top Layer w0.125: J1.A5 107.221,75.213 107.704,75.213 107.912,75.421 107.912,75.904 107.477,76.339 107.256,76.339 v1(107.194,76.401) ; R3.2 107.985,79.523 108.062,79.446 108.062,79.43 v1(108.365,79.127)
  Bottom Layer w0.125: v1(107.194,76.401) 107.194,77.057 108.365,78.228 v1(108.365,79.127)
NetJ1_B5: J1.B5 R4.1 | length 10.1
  Top Layer w0.125: R4.1 104.09,79.523 105.525,78.089 105.615,78.089 105.857,77.847 105.857,77.757 106.202,77.412 106.202,76.94 105.674,76.413 105.234,76.413 104.019,75.197 104.019,73.951 104.294,73.676 J1.B5 J1.B5@105.416,73.714
NetJ1_SH1: J1.SH1 J1.SH2 J1.SH3 J1.SH4 | length 14.3
  Mid-Layer 1 w0.381: J1.SH3 105.655,76.826 106.172,77.343 107.952,77.343 108.037,77.258 108.116,77.258 108.469,76.905 J1.SH1
  Bottom Layer w0.381: J1.SH4 105.905,72.026 106.095,72.216 106.543,72.216 106.733,72.026 J1.SH2 108.469,73.29 108.839,73.66 108.839,75.184 108.469,75.554 J1.SH1
NetR6_2: R6.2 U555.4 | length 12.1
  Top Layer w0.125: U555.4 93.779,69.351 94.094,69.036 v1(94.094,68.951)
  Top Layer w0.15: R6.2 v1(104.144,70.151)
  Mid-Layer 1 w0.125: v1@94.094,68.851 v1(94.094,68.951)
  Bottom Layer w0.125: v1@94.02,68.951 99.685,68.951 100.548,69.814 100.99,69.814 101.082,69.722 103.715,69.722 v1(104.144,70.151)
NetU1_19: U1.19 U4.30 | length 9.5
  Top Layer w0.125: v1(92.744,73.051) 93.009,72.786 U4.30 ; U1.19 98.294,77.876 v1(98.544,78.126)
  Layer 2 w0.125: v1(92.744,73.051) 97.819,78.126 v1(98.544,78.126)
NetU4_20: U4.20 X1.3 | length 1.7
  Top Layer w0.125: X1.3@89.581,69.989 89.581,71.213 89.594,71.226 U4.20@89.594,71.731
OE: U4.31 U6.3 | length 5.7
  Top Layer w0.125: U4.31 94.144,73.186 94.371,72.958 94.371,71.264 94.606,71.029 94.606,70.53 95.523,69.613 95.865,69.613 96.075,69.824 96.467,69.824 U6.3
P1V1: C5.1 C6.1 C18.1 U4.23 U4.45 U4.50 | length 14.3
  Top Layer w0.125: C6.1@89.597,79.385 89.851,79.131 89.867,79.131 89.994,79.004 U4.50 89.994,77.888 90.038,77.844 ; 90.794,72.226 U4.23 90.794,70.925 91.119,70.6 C5.1 ; 92.106,77.601 91.994,77.713 U4.45 91.994,78.954 92.298,79.258 92.314,79.258 92.391,79.335 C18.1
  Top Layer w0.25: 89.994,77.8 89.994,77.751 90.144,77.601 92.106,77.601 ; 90.794,72.226 90.794,72.601 91.244,73.051 91.86,73.051 92.119,73.31 92.119,76.662 92.104,76.677 92.104,77.591
P3V3: C1.1 C2.1 C4.1 C7.1 C10.1 C11.1 C12.1 C13.1 C14.1 C15.1 C16.1 C17.1 C19.1 C21.1 C23.1 C25.1 R9.2 U2.5 U2.6 U3.1 U4.1 U4.10 U4.22 U4.33 U4.42 U4.43 U4.44 U4.48 U4.49 U5.8 U6.1 U6.12 U777.5 U777.6 u888.1 X1.1 X1.4 | length 38.3
  Top Layer w0.125: u888.1 80.819,74.951 80.882,74.889 81.205,74.889 81.342,74.751 81.472,74.751 C4.1 v1(81.544,75.376) ; U5.8 84.936,75.159 85.363,75.159 85.546,74.976 85.741,74.976 C1.1 v1(85.794,74.426) ; U777.5 85.894,70.726 85.894,71.026 85.794,71.126 U777.6 ; U2.5 85.896,77.726 85.969,77.799 85.969,78.914 86.173,79.118 86.173,79.277 86.251,79.355 86.251,79.371 C19.1@86.328,79.448 ; U2.6 85.95,78.126 ; C23.1 C23.1@85.794,73.954 ; v1@85.794,74.338 C23.1@85.794,73.954 ; C21.1 85.905,70.69 86.158,70.69 86.39,70.922 86.39,71.208 v1(86.396,71.214) ; C19.1 86.36,79.448 86.502,79.306 86.502,78.784 v1@86.498,78.78 ; v1(86.502,78.776) 86.469,78.744 86.469,78.216 86.562,78.123 86.562,78.08 86.759,77.883 U4.1 ; U4.10@86.746,73.999 U4.10 85.826,73.986 C23.1@85.794,73.954 ; v1(87.294,70.226) C2.1 88.072,69.754 88.307,69.989 X1.1 X1.1@88.307,69.014 ; v1(90.019,70.726) 90.414,70.331 90.417,70.331 C11.1@90.495,70.254 ; U4.22@90.394,71.731 90.394,70.876 90.646,70.624 C11.1@90.646,70.316 ; U4.49 90.394,79.001 90.05,79.345 90.05,79.624 89.825,79.849 89.734,79.849 89.597,79.985 89.597,80.017 89.674,80.094 89.706,80.094 89.763,80.151 89.958,80.151 90.108,80.001 v1(90.194,80.001) 90.194,79.913 90.272,79.836 90.272,79.726 90.496,79.501 90.691,79.501 C16.1 ; C16.1@90.644,79.448 90.766,79.326 90.766,78.716 U4.48@90.769,78.714 ; U4.44 92.394,77.901 92.544,77.751 92.944,77.751 93.119,77.926 C15.1 ; U4.43 93.216,78.421 93.223,78.413 94.19,78.413 94.197,78.421 94.465,78.421 94.477,78.433 94.539,78.433 C14.1@94.616,78.51 ; U4.33 94.151,73.986 94.354,73.783 94.354,73.732 94.574,73.512 94.758,73.512 C12.1@94.819,73.451 ; U4.42 94.255,77.586 94.388,77.453 94.465,77.453 94.5,77.419 94.539,77.419 C13.1@94.616,77.342 ; v1(94.019,78.826) 94.107,78.826 94.22,78.939 94.429,78.939 94.592,78.776 94.592,78.55 C14.1 C14.1@94.616,78.51 ; C13.1 C13.1@94.616,77.342 ; C25.1 C10.1 95.754,72.504 95.819,72.569 ; v1(94.819,72.976) 94.832,72.963 C25.1@94.832,72.517 ; C12.1 95.319,73.498 95.669,73.148 v1(95.669,73.128) ; v1(95.144,71.226) 95.169,71.201 95.669,71.201 95.982,71.201 96.095,71.088 96.437,71.088 96.55,71.201 96.694,71.201 ; 95.826,72.576 95.819,72.569 ; U3.1@96.189,72.576 U3.1 95.819,72.569 ; 96.694,70.851 96.694,71.201 ; U6.12 97.119,71.101 97.019,71.201 96.694,71.201 ; R9.2 v1(103.544,73.651) ; C13.1@94.616,77.342 C15.1 ; C15.1 C14.1@94.616,78.51
P5V: C3.1 C8.1 C9.1 C20.1 C22.1 C24.1 J5.6 J7.1 R7.2 U1.1 U1.20 U2.16 U3.3 U3.4 U6.11 U555.6 U777.16 | length 65.1
  Top Layer w0.125: v1(80.469,78.001) 81.384,78.001 J5.6 81.818,77.977 82.171,77.977 82.401,77.746 82.521,77.746 C20.1 ; C20.1@82.582,77.686 82.622,77.726 U2.16 ; v1(82.594,70.201) C22.1 82.921,70.673 82.974,70.726 U777.16 ; v1(93.569,70.701) 93.579,70.691 U555.6@93.579,70.151 ; U1.1 96.894,78.503 96.967,78.576 97.265,78.576 97.394,78.447 97.394,78.168 97.451,78.11 97.878,78.11 98.144,78.376 98.144,78.797 C9.1 99.036,78.851 99.061,78.826 99.439,78.826 J7.1 100.519,78.801 v1(100.644,78.676) ; U3.3 97.329,71.919 ; U3.4 97.301,72.569 97.404,72.466 97.404,71.993 97.329,71.919 ; U1.20 U1.20@97.394,78.126 ; U6.11 97.769,71.101 v1@97.912,71.244 ; C8.1 v1(98.476,71.244) v1@97.912,71.244 ; 97.329,71.919 97.532,71.716 C3.1 97.876,71.279 v1@97.912,71.244
  Top Layer w0.25: v1(100.494,72.751) 101.473,72.751 101.839,73.116 102.649,73.116 103.044,72.721 103.044,71.401 103.759,70.686 104.281,70.686 104.619,70.348 104.619,69.954 104.281,69.616 103.712,69.616 103.582,69.486 103.562,69.486 103.547,69.471 R7.2
  Layer 2 w0.125: v1(93.569,70.701) 94.631,71.764 95.945,71.764 96.095,71.914 96.437,71.914 96.587,71.764 97.357,71.764 v1(97.869,71.251)
  Bottom Layer w0.206: 84.023,73.235 84.388,73.235
  Bottom Layer w0.25: v1(80.469,78.001) 82.019,76.451 82.019,74.429 82.822,73.626 82.853,73.626 83.244,73.235 83.342,73.235 ; v1(82.594,70.201) 83.244,70.851 83.244,73.137 83.342,73.235 ; 84.023,73.235 83.342,73.235 ; 84.388,73.235 84.603,73.45 86.197,73.45 86.273,73.526 90.659,73.526 92.442,75.309 100.261,75.309 ; v1(98.476,71.244) 100.321,71.244 100.856,71.779 100.856,72.173 100.844,72.185 100.844,72.751 ; v1(100.494,72.751) 100.844,72.751 ; v1(100.644,78.676) 100.261,78.293 100.261,75.309 ; 100.261,75.309 100.669,74.901 100.741,74.901 101.019,74.623 101.019,73.491 100.844,73.317 100.844,72.751
QSPI_SCLK: U4.52 U5.6 | length 9.1
  Top Layer w0.125: v1(84.153,74.355) 84.214,74.355 84.392,74.176 U5.6 ; v1(89.194,77.251) U4.52
  Bottom Layer w0.125: v1(84.153,74.355) 84.494,74.013 85.965,74.013 87.122,75.171 87.122,75.287 87.398,75.563 88.315,75.563 89.194,76.443 v1(89.194,77.251)
QSPI_SD0: U4.53 U5.5 | length 10.7
  Top Layer w0.125: v1(84.169,73.688) 84.224,73.632 84.875,73.632 U5.5 ; U4.53 88.794,77.784 88.759,77.749 88.759,77.103 89.047,76.814 89.459,76.814 89.646,77.001 v1(89.719,77.001)
  Bottom Layer w0.125: v1(84.169,73.688) 84.221,73.74 84.451,73.74 84.475,73.763 86.068,73.763 87.043,74.738 88.315,74.738 88.557,74.98 88.557,75.452 89.719,76.614 v1(89.719,77.001)
QSPI_SD1: U4.55 U5.2 | length 9.3
  Top Layer w0.125: U5.2 v1(83.019,74.676) ; U4.55@87.981,78.726 87.981,78.941 88.217,79.176 88.332,79.176 v1(88.394,79.238)
  Bottom Layer w0.125: v1(83.019,74.676) 83.027,74.676 83.456,75.105 83.456,75.875 84.095,76.513 85.445,76.513 86.457,77.526 86.833,77.526 88.332,79.025 88.332,79.176 v1(88.394,79.238)
QSPI_SD2: U4.54 U5.3 | length 9.2
  Top Layer w0.125: U5.3 82.856,74.176 82.931,74.101 v1(83.019,74.101) ; v1(88.319,77.524) 88.319,77.612 88.381,77.674 U4.54@88.381,78.701
  Bottom Layer w0.125: v1(83.019,74.101) 83.027,74.101 83.707,74.78 83.707,75.772 84.198,76.263 85.548,76.263 86.561,77.276 86.936,77.276 87.184,77.524 v1(88.319,77.524)
QSPI_SD3: U4.51 U5.7 | length 10.8
  Top Layer w0.125: v1(84.169,75.001) 84.169,74.934 84.427,74.676 U5.7 ; U4.51 89.594,77.709 90.294,77.009 v1(90.294,77.001)
  Bottom Layer w0.125: v1(84.169,75.001) 86.431,75.001 87.102,75.672 87.102,76.093 87.398,76.389 88.255,76.389 88.732,76.865 88.732,77.372 89.023,77.664 89.817,77.664 90.257,77.224 90.257,77.038 v1(90.294,77.001)
QSPI_SS: R5.2 U4.56 U5.1 | length 8.7
  Top Layer w0.125: U5.1 82.34,75.197 82.965,75.197 v1(83.019,75.251) ; v1(86.974,78.251) 87.557,78.251 87.569,78.263 U4.56@87.569,78.421 ; U4.56 87.594,78.936 87.624,78.966 R5.2
  Bottom Layer w0.125: v1(83.019,75.251) 83.019,76.055 83.832,76.868 83.832,77.672 84.073,77.914 85.408,77.914 85.471,77.851 86.574,77.851 v1(86.974,78.251)
RESET: J2.10 U4.26 | length 14.9
  Top Layer w0.125: v1(91.369,68.876) 91.369,69.347 91.582,69.559 91.582,70.497 91.994,70.909 U4.26 ; v1(100.819,69.401) 100.83,69.401 101.055,69.626 101.714,69.626 101.939,69.851 101.939,70.014 101.976,70.051 J2.10
  Bottom Layer w0.125: v1(91.369,68.876) 91.386,68.876 91.823,69.314 92.165,69.314 92.927,68.551 93.811,68.551 93.823,68.539 94.365,68.539 94.377,68.551 99.969,68.551 v1(100.819,69.401)
SWC: J2.1 U4.24 | length 10.6
  Top Layer w0.125: U4.24 91.194,72.176 91.33,72.312 91.33,72.415 v1(91.319,72.426) ; J2.1 99.494,71.656 v1(99.494,72.476)
  Bottom Layer w0.125: v1(91.319,72.426) 91.732,72.839 92.257,72.839 92.457,72.638 92.915,72.638 93.155,72.879 94.333,72.879 94.767,72.444 96.393,72.444 96.482,72.356 99.286,72.356 99.406,72.476 v1(99.494,72.476)
SWD: J2.2 U4.25 | length 12.6
  Top Layer w0.125: U4.25 91.594,72.066 91.799,72.271 91.888,72.271 91.969,72.352 v1(91.969,72.426) ; v1(100.381,71.976) 100.394,71.976 100.719,71.651 J2.2 102.139,72.471 v1(102.144,72.476)
  Bottom Layer w0.125: v1(91.969,72.426) 92.007,72.388 93.018,72.388 93.258,72.629 94.23,72.629 94.664,72.194 96.29,72.194 96.508,71.976 v1(100.381,71.976)
USB_N: R2.2 U4.46 | length 3.7
  Top Layer w0.125: U4.46 91.594,79.226 91.938,79.57 91.938,79.599 92.163,79.824 93.125,79.824 93.173,79.776 93.615,79.776 93.838,79.553 93.954,79.553 94.066,79.442 R2.2
USB_P: R1.2 U4.47 | length 4
  Top Layer w0.125: U4.47 91.194,79.201 91.688,79.695 91.688,79.703 92.059,80.074 93.229,80.074 93.276,80.026 R1.2
VUSB: J1.A4 J1.A9 J1.B4 J1.B9 | length 6.3
  Top Layer w0.125: J1.B4@105.569,73.176 v1(106.319,73.176) J1.A9@107.069,73.176 ; J1.B9@105.823,75.676 106.353,75.676 ; v1@106.353,76.114 106.353,75.676 ; J1.A4@107.218,75.676 106.353,75.676
  Mid-Layer 1 w0.125: v1(106.319,73.176) 106.319,76.079 v1(106.359,76.119)
pads on no net: J1. J1.A8 J1.B8 U4.21 U5.9 U555.5 u888.8

## Polygon pours and split planes (outlines as drawn)
GND on Mid-Layer 1 "GND_L02_P000" (solid, remove dead copper, pour order 0): 78.544,68.276 78.544,80.576 109.619,80.576 109.619,68.226 107.444,68.226
P3V3 on Layer 2 "P3V3_L03_P004" (solid, remove dead copper, pour order 4): 109.728,80.772 78.359,80.772 78.359,68.199 109.728,68.199
GND on Bottom Layer "GND_L04_P005" (solid, remove dead copper, pour order 5): 78.359,68.072 78.359,80.645 109.728,80.645 109.728,68.072 106.426,68.072
GND on Top Layer "GND_L01_P006" (solid, remove dead copper, pour order 6): 78.359,67.945 78.359,80.899 109.982,80.899 109.982,67.818 103.505,67.818

## Keep-outs
Keep-Out Layer:
  lines w0.05: 78.569,68.826 ccw(c79.069,68.826) 79.069,68.326 ; 78.569,68.826 ccw(c79.069,68.826) 79.069,68.326 ; 78.569,68.826 78.569,80.026 ; 78.569,68.826 78.569,80.026 ; 78.569,80.026 cw(c79.069,80.026) 79.069,80.526 ; 78.569,80.026 cw(c79.069,80.026) 79.069,80.526 ; 79.069,68.326 109.044,68.326 ; 79.069,68.326 109.044,68.326 ; 79.069,80.526 109.044,80.526 ; 79.069,80.526 109.044,80.526 ; 109.044,68.326 ccw(c109.044,68.826) 109.544,68.826 ; 109.044,68.326 ccw(c109.044,68.826) 109.544,68.826 ; 109.044,80.526 cw(c109.044,80.026) 109.544,80.026 ; 109.044,80.526 cw(c109.044,80.026) 109.544,80.026 ; 109.544,68.826 109.544,80.026 ; 109.544,68.826 109.544,80.026

## Silkscreen, mask and mechanical layers (free items; w line width, h text height)
Bottom Overlay:
  rectangle: 79.294,75.776 103.419,80.376
  rectangle: 79.294,68.501 103.319,73.001
  lines w0.05: 80.419,66.806 80.419,82.046
  text "PICOrom FLEX" at 108.769,72.996 h5
Top 3D Body:
  lines w0.05: 78.569,68.826 ccw(c79.069,68.826) 79.069,68.326 109.044,68.326 ccw(c109.044,68.826) 109.544,68.826 109.544,80.026 ccw(c109.044,80.026) 109.044,80.526 89.919,80.526 79.069,80.526 ccw(c79.069,80.026) 78.569,80.026 78.569,68.826 ; 92.394,69.676 93.394,69.676 93.394,70.676 92.394,70.676 92.394,69.676

## Text inside footprints (layer, text, board x,y; h text height)
D2: Top Assembly "K" at 100.944,74.676 h0.5
U3: Top Assembly "1" at 96.016,72.469 h0.3